# Altium PCB PCB1.PcbDoc
Units mm, origin at the board's own origin, x right, y up, seen from the top; angles counter-clockwise.
Board outline 100 x 75 mm, 2 copper layers (Top Layer, Bottom Layer), stack 1.571 mm thick; 44 components, 27 nets, 102 pads, 0 vias.
Unrouted connection lines stored in the file: 4.
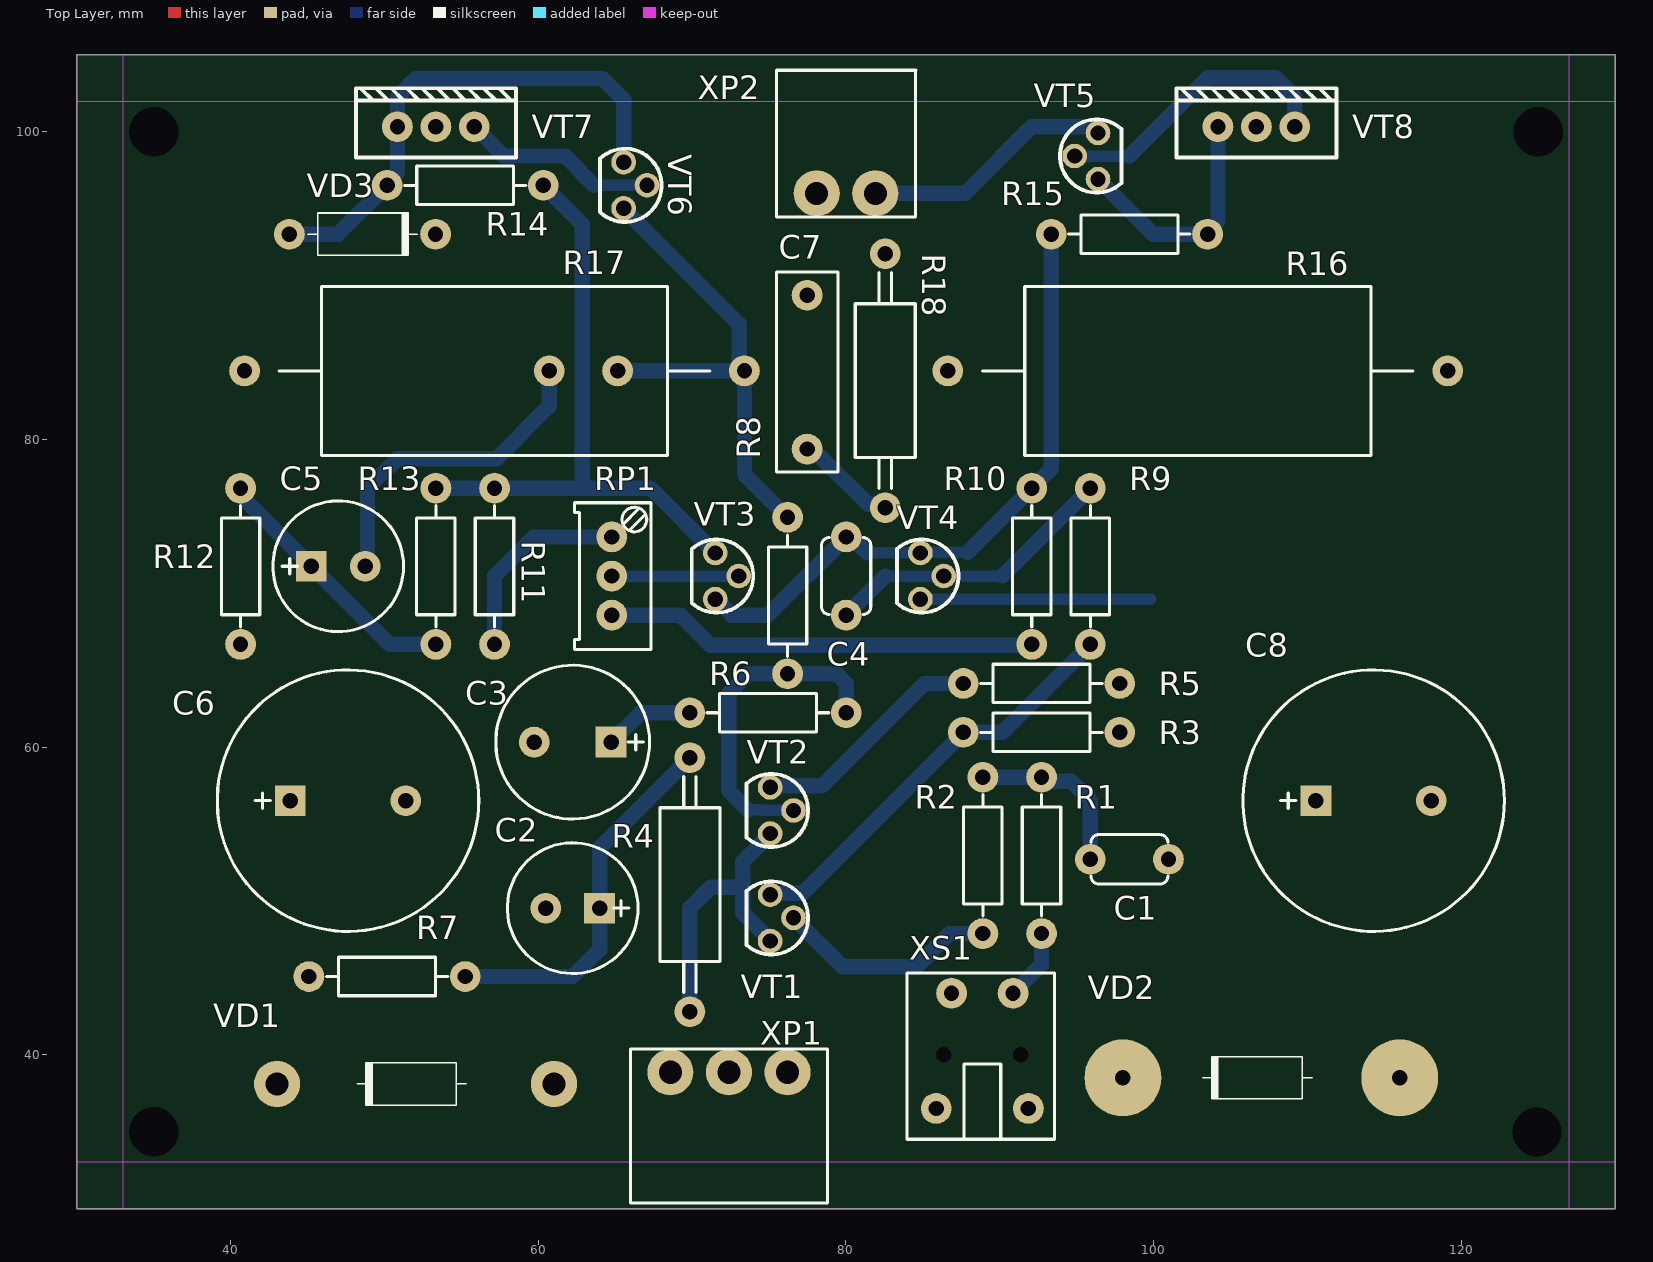
[diagram p0: Top Layer view]
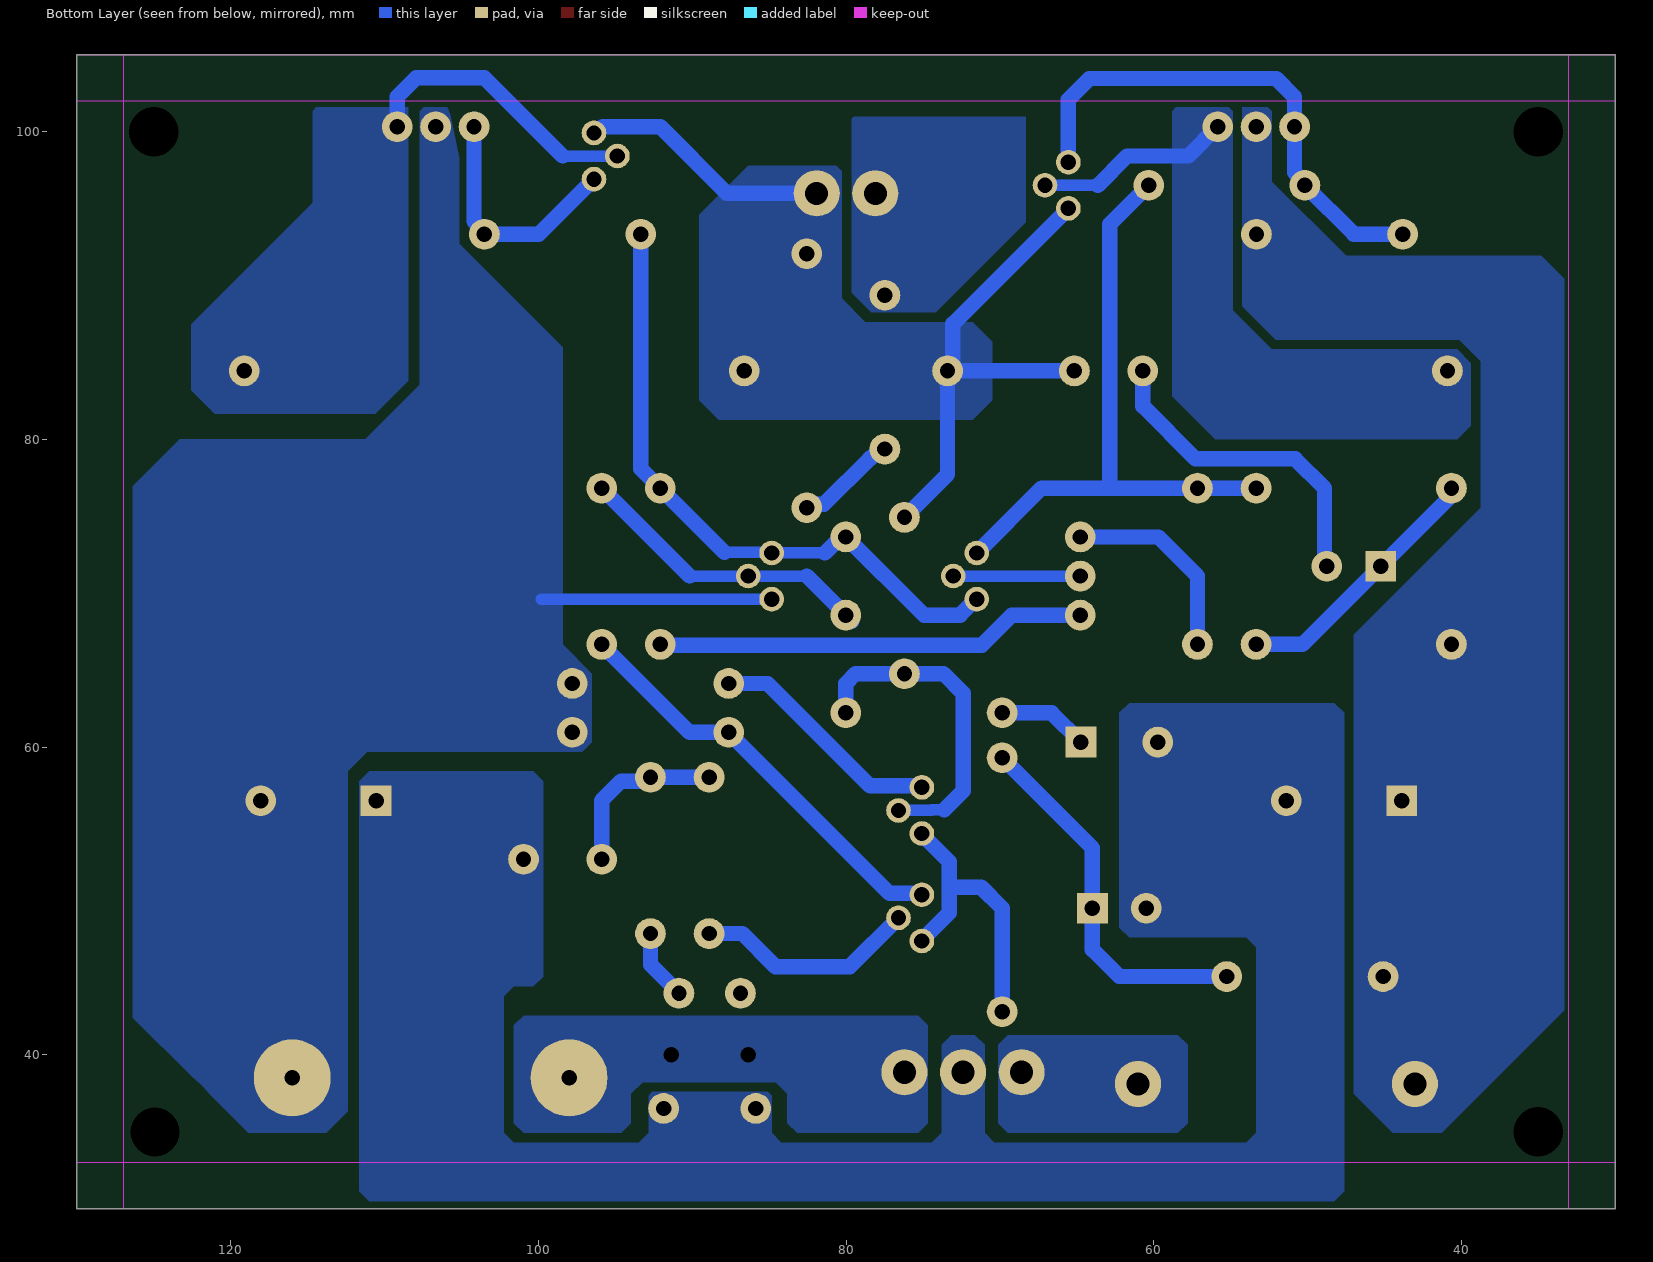
[diagram p1: Bottom Layer view, seen from below]
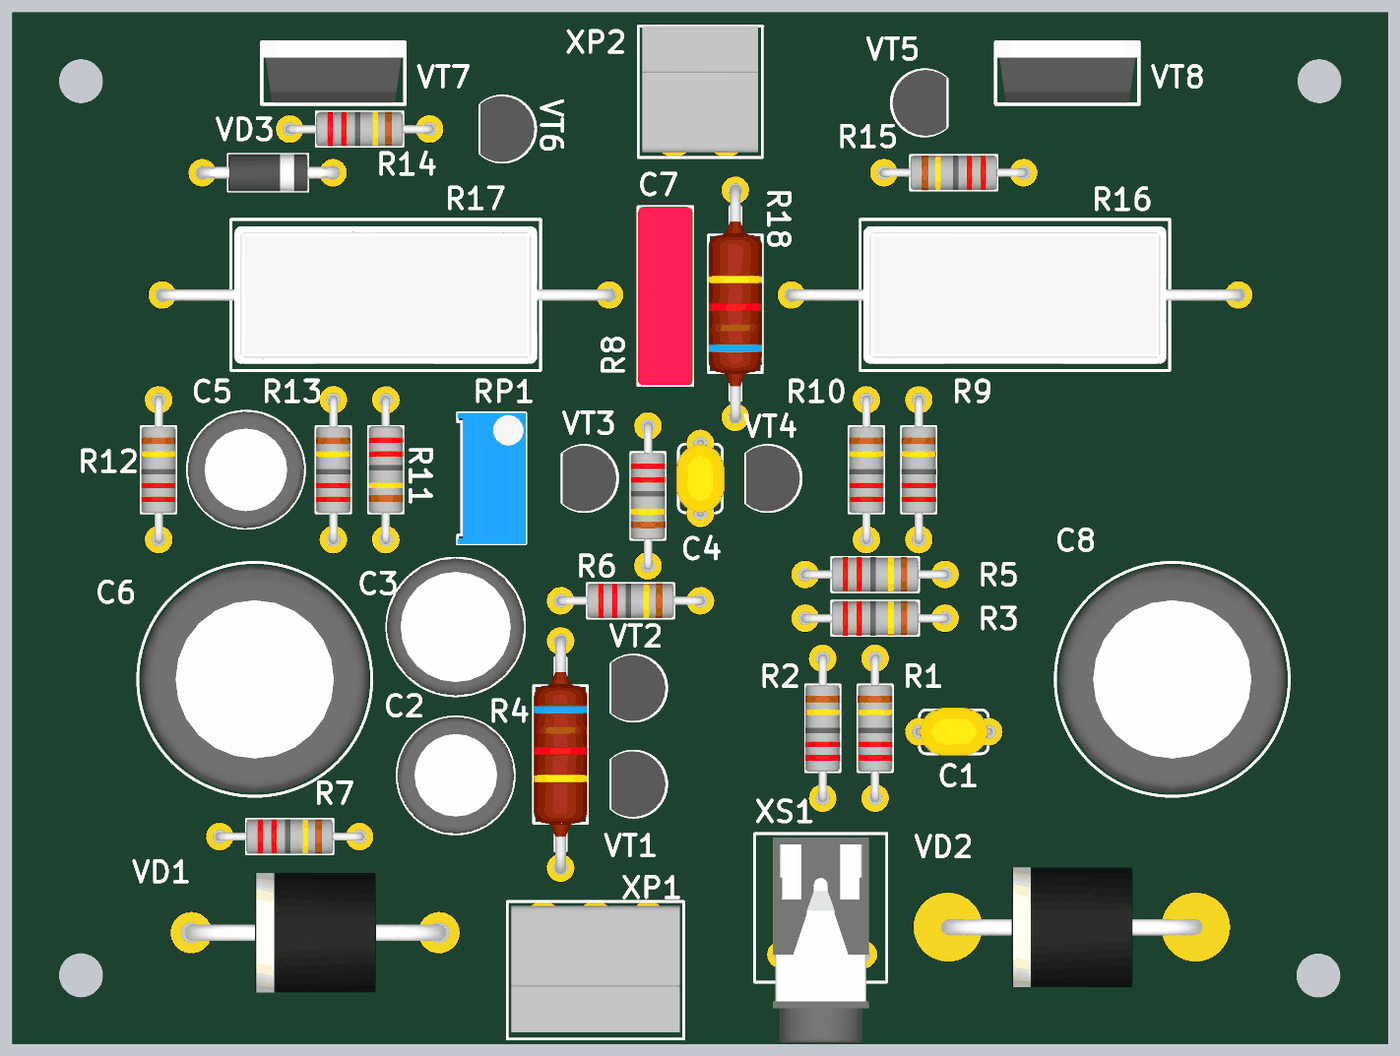
[diagram p2: 3D render of the assembled board from above, using the file's embedded part models]

## Layer stack, top to bottom
Top Solder: solder mask 0.0102, Solder Resist, Dk 3.5
Top Layer: signal copper 0.0356
Dielectric 1: dielectric 1.5, FR-4, Dk 4.8
Bottom Layer: signal copper 0.0356
Bottom Solder: solder mask 0.0102, Solder Resist, Dk 3.5

## Board outline
30,30 130,30 130,105 30,105

## Design rules (kind name [scope] priority, off if disabled: settings)
AcuteAngle [All] p1: minimum=3.50000000000000E+0001 checktracksonly=FALSE
BoardOutlineClearance "BoardOutlineClearance 1" [All] p1: gap=0.25 ignorepadtopadclearanceinfootprint=FALSE except(0: Arc-SplitContinuation Track-SplitContinuation SMDPad-SplitContinuation THPad-SplitContinuation Via-SplitContinuation Fill-SplitContinuation Poly-SplitContinuation Region-SplitContinuation Text-SplitContinuation) // Milling
Clearance "Clearance-1 1 Oz" [All] p1: gap=0.3 ignorepadtopadclearanceinfootprint=FALSE // Standart
ComponentClearance [All] p1: gap=0.1 collisioncheckmode=3 verticalgap=0.1 showdistances=FALSE
DiffPairsRouting "DiffPairsRouting 1 Oz" [All] p1: maxlimit=0.254 minlimit=0.2 mostfreqgap=0.254 toplayer_minwidth=0.2 toplayer_maxwidth=0.381 toplayer_prefwidth=0.381 bottomlayer_minwidth=0.2 bottomlayer_maxwidth=0.381 bottomlayer_prefwidth=0.381 maxuncoupledlength=12.7
Height [All] p1: minheight=0 maxheight=50 prefheight=12.7
HoleSize "Minimum HoleSize" [IsPad] p1: absolutevalues=TRUE maxlimit=5.9 minlimit=0.6 maxpercent=80.000 minpercent=20.000
HoleSize "Minimum HoleSize VIA 1" [IsVia] p2: absolutevalues=TRUE maxlimit=5.9 minlimit=0.3 maxpercent=80.000 minpercent=20.000 // Standart
HoleToHoleClearance Hole2HoleClearance [All] p1: gap=0.25 allowstackedmicrovias=FALSE
MinimumAnnularRing "Minimum AR VIA Standart" [All] p1: minimumring=0.15
MinimumAnnularRing "Minimum AR PAD Standart" [All] p2: minimumring=0.2
MinimumSolderMaskSliver "SolderMask Bridge Standart" [All] p1: minsoldermaskwidth=0.15 // All Masks
PlaneClearance "PlaneClearance 1 Oz" [All] p1: clearance=0.2
PlaneConnect "TermalConnect-1 1 Oz" [All] p1: planeconnectstyle=Relief reliefexpansion=0.2 reliefentries=4 reliefconductorwidth=0.2 reliefairgap=0.2 // Standart
PolygonConnect [All vs IsNamedPolygon('NONET_L-01_P-001')] p1: thpad.connectstyle=Direct thpad.reliefconductorwidth=0.254 thpad.reliefentries=4 thpad.polygonreliefangle="90 Angle" thpad.airgapwidth=0.254 smdpad.connectstyle=Relief smdpad.reliefconductorwidth=0.254 smdpad.reliefentries=4 smdpad.polygonreliefangle="90 Angle" smdpad.airgapwidth=0.254 via.connectstyle=Direct via.reliefconductorwidth=0.254 via.reliefentries=4 via.polygonreliefangle="90 Angle" via.airgapwidth=0.254
PolygonConnect "PolygonConnect-1 1 Oz" [All] p2: thpad.connectstyle=Relief thpad.reliefconductorwidth=0.2 thpad.reliefentries=4 thpad.polygonreliefangle="90 Angle" thpad.airgapwidth=0.2 smdpad.connectstyle=Relief smdpad.reliefconductorwidth=0.2 smdpad.reliefentries=4 smdpad.polygonreliefangle="90 Angle" smdpad.airgapwidth=0.2 via.connectstyle=Direct via.reliefconductorwidth=0.254 via.reliefentries=4 via.polygonreliefangle="90 Angle" via.airgapwidth=0.254 // Standart
RoutingCorners [All] p1 off: cornerstyle=45-Degree minsetback=2.54 maxsetback=2.54
RoutingVias [All] p1: holewidth=0.4 width=0.8 viastyle="Through Hole" minholewidth=0.3 minwidth=0.6 maxholewidth=5.9 maxwidth=8.9
SilkToSilkClearance Silk2SilkClearance [All] p1 off: silktosilkclearance=0.15
SilkToSolderMaskClearance Silk2SolderMaskClearance [IsPad] p1 off: minsilkscreentomaskgap=0.15 clearancetoexposedcopper=TRUE
SolderMaskExpansion SolderMaskExpansion-1 [All] p1: expansion=0.05 istentingtop=FALSE // Standart
UnRoutedNet [All] p1: checkbadconnections=TRUE
Width "Width 1 Oz" [All] p1: maxlimit=10 minlimit=0.2 preferedwidth=0.254 checkconnectedcopper=TRUE
18 further rules are at their usual default settings.

## Classes and differential pairs
component class Sheet1: C1 C2 C3 C4 C5 C6 C7 C8 R1 R2 R3 R4 R5 R6 R7 R8 R9 R10 R11 R12 R13 R14 R15 R16 R17 R18 RP1 VD1 VT1 VT2 VT3 VT4 VT5 VT6 VT7 VT8 XP1 XS1

## Components (designator, comment, footprint, x,y, rotation, side; value= is the part's Value field where it differs from the comment)
C1 "Cap Ceramic 100pF" CAPRR508-350X500X500 98.425,52.705 r0 top
C2 "2200uF 35V" CAPPR350-800X700 62.23,49.53 r180 top
C3 "100uF 100V" CAPPR500-1000X2050 62.23,60.325 r180 top
C4 "Cap Ceramic 100pF" CAPRR508-350X500X500 80.01,71.12 r90 top
C5 "2200uF 35V" CAPPR350-800X700 46.99,71.755 r0 top
C6 "2200uF 35V" CAPPR750-1600X3150 47.625,56.515 r0 top
C7 "2200uF 35V" CAPR1000-400X1300X950 77.47,84.375 r90 top
C8 "2200uF 35V" CAPPR750-1600X3150 114.3,56.515 r0 top
R1 "Resistor 0.25W" RES1016-630X250 92.71,52.959 r270 top
R2 "Resistor 0.25W" RES1016-630X250 88.9,52.959 r270 top
R3 "Resistor 0.25W" RES1016-630X250 92.71,60.96 r180 top
R4 "Resistor 1W" RES1651-1000X390 69.85,51.054 r270 top
R5 "Resistor 0.25W" RES1016-630X250 92.71,64.135 r180 top
R6 "Resistor 0.25W" RES1016-630X250 74.93,62.23 r180 top
R7 "Resistor 0.25W" RES1016-630X250 50.165,45.085 r180 top
R8 "Resistor 0.25W" RES1016-630X250 76.2,69.85 r90 top
R9 "Resistor 0.25W" RES1016-630X250 95.885,71.755 r270 top
R10 "Resistor 0.25W" RES1016-630X250 92.075,71.755 r270 top
R11 "Resistor 0.25W" RES1016-630X250 57.15,71.755 r90 top
R12 "Resistor 0.25W" RES1016-630X250 40.64,71.755 r270 top
R13 "Resistor 0.25W" RES1016-630X250 53.34,71.755 r270 top
R14 "Resistor 0.25W" RES1016-630X250 55.245,96.52 r180 top
R15 "Resistor 0.25W" RES1016-630X250 98.425,93.345 r0 top
R16 "Resistor 5W" RES_5W 102.87,84.455 r180 top
R17 "Resistor 5W" RES_5W 57.15,84.455 r180 top
R18 "Resistor 1W" RES1651-1000X390 82.55,83.82 r90 top
RP1 "Resistor film, =Value, , 3296W, 0.5W, -55...+125°C" TRIM_BOURNS_3296W 64.77,71.12 r270 top
VD1 "Diode 15SQ045" R6#1 56.515,38.1 r180 top
VD2 "Diode 15SQ045" R6#2 111.5,38.5 r180 top
VD3 "Diode 1N4002" DO-41 43.815,93.345 r0 top
VT1 "BC556B" TO-92-A 75.565,48.895 r90 top
VT2 "BC556B" TO-92-A 75.565,55.88 r90 top
VT3 "Transistor NPN BC546C" TO-92-A 72,71.12 r90 top
VT4 "Transistor NPN BC546C" TO-92-A 85.335,71.12 r90 top
VT5 "BC556B" TO-92-A 95.885,98.425 r270 top
VT6 "BC546C" TO-92-A 66.04,96.52 r90 top
VT7 "" TO-220AB 53.34,100.33 r0 top
VT8 "IRF9510PBF" TO-220AB 106.68,100.33 r0 top
XP1 "Общий" 15EDGRC-3.81-03P 72.39,38.862 r0 top
XP2 "Connector Dynamic 2 pin" 15EDGRC-3.81-02P 80,96 r180 top
XS1 "Общий" ST-025 85.46,35.905 r0 top
ZBOAS196893188 "Comment" "BOASVIEWside:Вид платы сверху:1:0:0:0" 50,2367 r0 top
ZBOAS196894921 "Слой 2" "BOASVIEWlayer:Bottom Layer:1:1:32:1" 50,2411 r0 top (schematic designator fewf)
ZBOAS753997874 "Comment" "BOASVIEWdrill:Таблица отверстий:0:0:0:0" 191.5,2486 r0 top

## Footprints (in the part's own frame and the unit in brackets; to place one, negate y for a bottom-side part, rotate by r counter-clockwise, add the part's x,y. Pads: shape width x height; smd on the part's side, far side on the other; paste and mask are expansions set on the pad)
15EDGRC-3.81-02P [mm] "PCB Header, 8A, 160 V, Pitch: 3.81mm, 2 Positions, MCV Serie"
  round 3 hole 1.5 unplated: 1(-1.905,0) 2(1.905,0)
  silkscreen extent -4.56,-8 4.51,1.55, body extent -4.21,-8 4.21,1.2, height 7.29
15EDGRC-3.81-03P [mm] "PCB Header, 8A, 160 V, Pitch: 3.81mm, 3 Positions, MCV Serie"
  round 3 hole 1.5 unplated: 1(-3.81,0) 2(0,0) 3(3.81,0)
  silkscreen extent -6.41,-8.5 6.41,1.5, body extent -6.11,-8 6.11,1.2, height 7.29
"BOASVIEWdrill:Таблица отверстий:0:0:0:0" [mm]
"BOASVIEWlayer:Bottom Layer:1:1:32:1" [mm]
"BOASVIEWside:Вид платы сверху:1:0:0:0" [mm]
CAPPR350-800X700 [mm] "Capacitor, Radial, Pin spacing 3.5mm - Body Diameter 8mm X Body Height 7mm"
  rect 2x2 hole 1 unplated: 1(-1.75,0)
  round 2 hole 1 unplated: 2(1.75,0)
  silkscreen extent -4.25,-4.25 4.25,4.25, body extent -4.26,-4.26 4.24,4.23, height 7
CAPPR500-1000X2050 [mm] "Capacitor, Radial, Pin spacing 5.0mm - Body Diameter 10mm X Body Height 20.5mm"
  rect 2x2 hole 1 unplated: 1(-2.5,0)
  round 2 hole 1 unplated: 2(2.5,0)
  silkscreen extent -5,-5 5,5, body extent -5,-5 5,5, height 20.5
CAPPR750-1600X3150 [mm] "Capacitor, Radial, Pin spacing 7.5mm - Body Diameter 16mm X Body  Height 31.5mm"
  rect 2x2 hole 1 unplated: 1(-3.75,0)
  round 2 hole 1 unplated: 2(3.75,0)
  silkscreen extent -8.5,-8.5 8.5,8.5, body extent -8.25,-8.24 8.25,8.24, height 27
CAPR1000-400X1300X950 [mm] "Capacitor Radial, Pin spacing 10mm - Body With 4mm X Body Length 13mm X Body Height 9.5mm"
  round 2 hole 1 unplated: 1(-5,0) 2(5,0)
  silkscreen extent -6.5,-2 6.5,2, body extent -6.5,-2 6.5,2, height 9.5
CAPRR508-350X500X500 [mm] "Capacitor Radial Rounded, Pin spacing 5.08mm - Body With 3.2mm X Body Length 5.0mm X Body Height 5.0mm"
  round 2 hole 1 unplated: 1(-2.54,0) 2(2.54,0)
  silkscreen extent -2.5,-1.6 2.5,1.6, body extent -2.79,-1.75 2.79,1.75, height 5
DO-41 [mm]
  round 2 hole 1 unplated: 1(0,0) 2(9.5,0)
  silkscreen extent 1.2,-1.38 8.3,1.38, body extent -0.39,-1.35 9.99,1.35, height 2.83
R6#1 [mm]
  round 3 hole 1.5 unplated: 1(-4.5,0) 2(13.5,0)
  silkscreen extent 1.2,-1.38 8.3,1.38, body extent -5,-4.35 13.96,4.35, height 9.35
R6#2 [mm]
  round 5 hole 1: 1(-4.5,0) 2(13.5,0)
  silkscreen extent 1.2,-1.38 8.3,1.38, body extent -5,-4.35 13.96,4.35, height 9.35
RES1016-630X250 [mm] "Resistor, Axial, Pad spacing 10.16 mm - Body Lengh 6.3mm X Body Diameter 2.5mm"
  round 2 hole 1 unplated: 1(-5.08,0) 2(5.08,0)
  silkscreen extent -3.95,-1.25 3.95,1.25, body extent -5.38,-1.27 5.38,1.26, height 2.51
RES1651-1000X390 [mm] "Resistor, Axial, Pad spacing 16.51mm - Body Lengh 10mm X Body Diameter 3.9mm"
  round 2 hole 1 unplated: 1(-8.255,0) 2(8.255,0)
  silkscreen extent -7.02,-1.95 7.02,1.95, body extent -8.64,-1.95 8.65,1.95, height 3.9
RES_5W [mm] "Resistor, Axial, Pad spacing 10.16 mm - Body Lengh 6.3mm X Body Diameter 2.5mm"
  round 2 hole 1 unplated: 1(-16.25,0) 2(16.25,0)
  silkscreen extent -14,-5.5 14,5.5, body extent -16.65,-5 16.65,5, height 9
ST-025 [mm]
  round 2 hole 1 unplated: 1(0.4,0.6) 1(6.4,0.6) 2(1.4,8.1) 3(5.4,8.1)
  round 0.9 hole 1 unplated: 2(0.9,4.1) 2(5.9,4.1)
  silkscreen extent -1.5,-1.4 8.1,9.4, body extent -0.44,-5.8 7.04,9.1, height 6
TO-92-A [mm]
  round 1.6 hole 1 unplated: 1(1.5,0.5) 2(0,-1.025) 3(-1.5,0.5)
  silkscreen extent -2.38,-1.97 2.38,2.02, body extent -2.4,-1.92 2.4,2.01, height 10
TO-220AB [mm] "КТ-28-2"
  round 2 hole 1 unplated: 1(-2.5,0) 2(0,0) 3(2.5,0)
  silkscreen extent -5.2,-2 5.2,2.5, body extent -5.1,-1.9 5.1,2.6, height 26.06
TRIM_BOURNS_3296W [mm] "Trimming Potentiometer BOURNS 3296W Series"
  round 2 hole 1 unplated: 1(-2.54,0) 2(0,0) 3(2.54,0)
  silkscreen extent -4.76,-2.41 4.76,2.54, body extent -4.76,-2.41 4.77,2.55, height 11.55

## Part data
C2 C5: library part "Cap Polarity 47uF 50V", Type=Конденсатор
C3: library part "Cap Polarity 100uF 100V", Type=Конденсатор
C6 C8: library part "Cap Polarity 2200uF 35V", Type=Конденсатор
C7: library part "Cap Film 0.68uF 250V", Type=Конденсатор
RP1: library part "Resistor Trimmer 1K", Manufacturer=Bourns, Package=3296W, PartNumber=3296W-1-103LF, Power=0.5W, Temperature=-55...+125°C, TypeResistor="Resistor film", ValueManufacturerPartNumber="Resistor film, =Value, , 3296W, 0.5W, -55...+125°C", HelpURL=https://www.digikey.com/product-detail/en/bourns-inc/3296W-1-103LF/3296W-103LF-ND/1088045
VT7: library part IRF510PBF
XP1: library part "Connector Power 3 pin"
XS1: library part "Connector Audio 3 pin"
C1 C4: Type=Конденсатор
R1 R2 R3 R4 R5 R6 R7 R8 R9 R10 R11 R12 R13 R14 R15 R16 R17 R18: Type=Резистор
VD1 VD2 VD3: Published=18.05.2010, Publisher="Andrew Danich", Type=Диод

## Free pads (board coordinates)
  round 2 hole 1 unplated: 3(60.706,84.455) 3(65.151,84.455)
  round 3 hole 3.2 unplated: A(35,35) A(35,100) A(124.922,34.979) A(125,100)

## Nets (pads, with @x,y where several pads share a name; then routed paths per layer and width w, separated by ;. In a path a pad name is that pad's centre, name@x,y a point inside that pad or via, vN(x,y) a via of type N, cw(c..) or ccw(c..) an arc to the next point about the centre after c; other vN are vias at no path point)
GND: C1.2 C2.2 C3.2 C6.2 C7.2 C8.1 XP1.2 XP2.2 XS1.1
NetC1_1: C1.1 R1.1 R2.1 | length 11.3
  Bottom Layer w1: R2.1 R1.1 ; R1.1@92.71,57.785 94.615,57.785 95.885,56.515 C1.1
NetC2_1: C2.1 R4.1 R7.1 VD1.2 | length 24.4
  Bottom Layer w1: R7.1 62.23,45.085 63.98,46.835 C2.1 63.98,53.439 R4.1
NetC3_1: C3.1 R6.2 | length 5.9
  Bottom Layer w1: C3.1 66.635,62.23 R6.2
NetC4_1: C4.1 R9.1 VT4.2 | length 20.1
  Bottom Layer w0.75: 82.55,71.12 85.48,71.12 VT4.2 90.17,71.12
  Bottom Layer w1: C4.1@79.622,68.192 82.55,71.12 ; 90.17,71.12 R9.1@96.081,77.031
NetC4_2: C4.2 R10.1 R15.1 VT3.3 VT4.1 | length 42.4
  Bottom Layer w0.75: 81.375,72.62 VT4.1@84.781,72.62 ; VT4.1@84.835,72.658 87.898,72.658
  Bottom Layer w1: VT3.3 71.535,69.62 72.575,68.58 74.93,68.58 C4.2@80.121,73.771 ; C4.2 80.335,73.66 81.375,72.62 ; 87.898,72.658 93.345,78.105 R15.1
NetC5_1: C5.1 R12.1 R13.2 | length 17.2
  Bottom Layer w1: R12.1 40.755,76.72 40.755,76.24 C5.1 50.32,66.675 R13.2
NetC5_2: C5.2 pad.3 R8.2 R16.2 R17.1 R18.2 VT5.3 VT6.3 XP2.1 | length 70.6
  Bottom Layer w1: C5.2 48.895,71.91 48.895,76.835 50.8,78.74 57.277,78.74 60.706,82.169 pad.3@60.706,84.455 ; pad.3@65.151,84.455 R17.1 ; VT6.3 73.051,87.509 73.051,84.804 R17.1 ; R8.2 73.4,77.73 R17.1 ; XP2.1 87.745,96 92.075,100.33 95.818,100.33 96.223,99.925 VT5.3
NetC6_1: C6.1 R7.2 R12.2 VD3.2 VT7.2
NetC7_1: C7.1 R18.1 | length 6.7
  Bottom Layer w1: C7.1 77.795,79.375 78.395,78.775 78.451,78.775 81.431,75.795 82.32,75.795 R18.1
NetC8_2: C8.2 R3.1 R5.1 VD2.1 VT4.3 VT8.2 | length 15
  Bottom Layer w0.75: VT4.3 99.798,69.62
NetR1_2: R1.2 XS1.3 | length 4.4
  Bottom Layer w1: XS1.3 92.71,45.855 R1.2@92.71,47.625
NetR2_2: R2.2 VT1.2 | length 14.5
  Bottom Layer w1: VT1.2 79.765,45.72 84.582,45.72 86.741,47.879 R2.2
NetR3_2: R3.2 R9.2 VT1.1 | length 27.9
  Bottom Layer w1: VT1.1 75.165,50.495 77.165,50.495 R3.2 ; R3.2@87.305,60.96 90.17,60.96 R9.2
NetR4_2: R4.2 VT1.3 VT2.3 | length 19.2
  Bottom Layer w1: R4.2 69.85,49.53 71.208,50.888 73.279,50.888 ; VT1.3 75.065,47.449 73.279,49.235 73.279,50.888 ; VT2.3 75.065,54.326 73.279,52.54 73.279,50.888
NetR5_2: R5.2 VT2.1 | length 15.4
  Bottom Layer w1: VT2.1 75.165,57.48 78.435,57.48 85.09,64.135 R5.2
NetR6_1: R6.1 R8.1 VT2.2 | length 21.4
  Bottom Layer w0.75: 73.622,55.918 74.441,55.918 74.454,55.905 76.538,55.905 VT2.2@76.552,55.918
  Bottom Layer w1: 73.622,55.918 72.39,57.15 72.39,63.5 73.66,64.77 R8.1 79.375,64.77 80.01,64.135 R6.1 ; VT2.2@76.552,55.918 VT2.2
NetR10_2: R10.2 RP1.3 | length 28.1
  Bottom Layer w1: RP1.3 69.215,68.58 71.178,66.617 92.017,66.617 R10.2
NetR11_1: R11.1 RP1.1 | length 13.1
  Bottom Layer w1: R11.1 57.15,71.12 59.69,73.66 RP1.1@64.796,73.66
NetR11_2: R11.2 R13.1 R14.1 VT3.1 | length 40.6
  Bottom Layer w1: R13.1 R11.2 62.865,76.835 ; R14.1 62.865,93.98 62.865,76.835 ; VT3.1 67.285,76.835 62.865,76.835
NetR14_2: R14.2 VD3.1 VT6.1 VT7.1 | length 33.5
  Bottom Layer w1: VD3.1 46.99,93.345 R14.2 50.165,96.682 50.84,97.357 50.84,102.275 52.03,103.465 64.175,103.465 65.54,102.1 VT6.1
NetR15_2: R15.2 VT5.1 VT8.1 | length 15.9
  Bottom Layer w1: VT5.1 99.965,93.345 R15.2 103.505,93.507 104.18,94.182 VT8.1
NetR16_1: R16.1 VT5.2 VT8.3 | length 18.9
  Bottom Layer w0.75: VT5.2 98.425,98.425
  Bottom Layer w1: 98.425,98.425 103.505,103.505 107.95,103.505 109.18,102.275 VT8.3
NetR17_2: R17.2 VT6.2 VT7.3 | length 12.8
  Bottom Layer w0.75: 63.627,96.52 VT6.2
  Bottom Layer w1: VT7.3 57.745,98.425 61.722,98.425 63.627,96.52
NetRP1_2: RP1.2 VT3.2 | length 8.3
  Bottom Layer w0.75: RP1.2 VT3.2
NetVD1_1: VD1.1 XP1.1
NetVD2_2: VD2.2 XP1.3
pads on no net: XS1.2

## Polygon pours and split planes (outlines as drawn)
NetC8_2 on Bottom Layer "NONET_L-01_P-001" (solid, remove dead copper, pour order 9): 113.792,34.925 118.872,34.925 126.365,42.418 126.365,76.962 123.317,80.01 111.252,80.01 107.696,83.566 107.696,101.346 107.442,101.6 105.918,101.6 105.718,101.118 105.156,98.291 105.156,92.71 98.425,85.979 98.425,66.675 96.52,64.77 96.52,60.325 97.155,59.69 111.125,59.69 112.395,58.42 112.395,36.322
no net on Bottom Layer "NONET_L-01_P-001" (solid, remove dead copper, pour order 6): 75.311,34.925 83.185,34.925 83.82,35.56 83.82,37.465 84.582,38.227 93.218,38.227 93.98,37.465 93.98,35.56 94.615,34.925 100.965,34.925 101.6,35.56 101.6,41.91 100.965,42.545 75.311,42.545 74.676,41.91 74.676,35.56
GND on Bottom Layer "NONET_L-01_P-001" (solid, remove dead copper, pour order 10): 79.629,89.535 78.359,88.265 74.168,88.265 68.326,94.107 68.326,100.965 79.502,100.965 79.629,100.838
GND on Bottom Layer "NONET_L-01_P-001" (solid, remove dead copper, pour order 8): 73.787,40.64 73.787,34.925 74.422,34.29 84.201,34.29 84.836,34.925 84.836,37.338 85.09,37.592 92.583,37.592 92.837,37.338 92.837,34.925 93.472,34.29 101.6,34.29 102.235,34.925 102.235,43.815 101.6,44.45 100.33,44.45 99.695,45.085 99.695,57.785 100.33,58.42 110.998,58.42 111.633,57.785 111.633,31.115 110.998,30.48 48.26,30.48 47.625,31.115 47.625,62.23 48.26,62.865 61.595,62.865 62.23,62.23 62.23,48.26 61.595,47.625 53.975,47.625 53.34,46.99 53.34,34.925 53.975,34.29 70.358,34.29 70.993,34.925 70.993,40.64 71.628,41.275 73.152,41.275
NetR16_1 on Bottom Layer "NONET_L-01_P-001" (solid, remove dead copper, pour order 3): 108.458,101.6 108.458,83.82 110.617,81.661 121.031,81.661 122.555,83.185 122.555,87.503 114.681,95.377 114.681,101.346 114.427,101.6
NetC5_2 on Bottom Layer "NONET_L-01_P-001" (solid, remove dead copper, pour order 0): 80.289,97.434 80.289,89.179 78.74,87.63 71.755,87.63 70.485,86.36 70.485,82.55 71.755,81.28 88.265,81.28 89.535,82.55 89.535,94.615 86.36,97.79 80.645,97.79
NetVD1_1 on Bottom Layer "NONET_L-01_P-001" (solid, remove dead copper, pour order 5): 57.785,40.64 57.785,35.56 58.42,34.925 69.469,34.925 70.104,35.56 70.104,40.64 69.469,41.275 58.42,41.275
NetR17_2 on Bottom Layer "NONET_L-01_P-001" (solid, remove dead copper, pour order 2): 54.864,101.346 54.864,88.392 52.324,85.852 40.259,85.852 39.37,84.963 39.37,80.899 40.259,80.01 56.007,80.01 58.801,82.804 58.801,101.346 58.547,101.6 55.118,101.6
NetC6_1 on Bottom Layer "NONET_L-01_P-001" (solid, remove dead copper, pour order 1): 54.229,101.6 54.229,88.646 52.07,86.487 40.132,86.487 38.735,85.09 38.735,75.565 46.99,67.31 46.99,37.465 44.45,34.925 41.275,34.925 33.02,43.18 33.02,90.17 34.798,91.948 47.491,91.948 52.324,96.765 52.324,101.346 52.578,101.6

## Keep-outs
Keep-Out Layer:
  rectangle: 30,30 130,33
  rectangle: 30,102 130,105
  rectangle: 127,30 130,105
  rectangle: 30,30 33,105

## Silkscreen, mask and mechanical layers (free items; w line width, h text height)
Mechanical 1:
  the board outline again, w0.1
Mechanical 7:
  text "BOASFORMAT|А3|1|0|883070867|165354330|1000000000|1:1|" at 0,2540 h0
  text "- Данные отверстий" at 223.979,2488.436 h7.68
  text "+0.1" at 256.845,2468 h3.5
  text "+0.1" at 207.84,2467.845 h3.5
  text "DimH|-4330709|-196851|34251969|971259843|-5905512|9645669|1||±0.5||js12|False|False|False|False" at 87,2467 h0
  text "DimH|-39370078|0|58661417|970866142|-19685039|3937008|1||±0.5||js12|False|False|False|False" at 149,2466 h0
  text "DimV|0|-29527559|58661417|970866142|3937008|-14763780|1||±0.5||js12|False|False|False|False" at 149,2466 h0
  text "DimH|-39370078|0|58661417|970866142|-19685039|3937008|1||±0.5||js12|False|False|False|False" at 149,2466 h0
  text "DimH|-39370078|0|58661417|970866142|-19685039|3937008|1||±0.5||js12|False|False|False|False" at 149,2466 h0
  text "DimV|0|-29527559|58661417|970866142|3937008|-14763780|1||±0.5||js12|False|False|False|False" at 149,2466 h0
  text "DimH|-39370078|0|58661417|970866142|0|3937008|1||±0.5||js12|False|False|False|False" at 149,2466 h0
  text "DimV|0|-29527559|58661417|970866142|3937008|0|1||±0.5||js12|False|False|False|False" at 149,2466 h0
  text "DimV|0|-29527559|58661417|970866142|3937008|0|1||||js12|False|False|False|False" at 149,2466 h0
  text "DimH|-39370078|0|58661417|970866142|-787401|3937008|1||||js12|False|False|False|False" at 149,2466 h0
  text "-0.1" at 256.845,2464 h3.5
  text "-0.1" at 207.84,2463.845 h3.5
  text "+0.1" at 209.84,2458.845 h3.5
  text "+0.1" at 256.84,2458.845 h3.5
  text "-0.1" at 209.84,2454.845 h3.5
  text "-0.1" at 256.84,2454.845 h3.5
  text "+0.1" at 210.84,2449.845 h3.5
  text "-0.1" at 210.84,2445.845 h3.5
  text "DimRoughness|0|0|-40157480|-928346457|1|||||0|0|False|2" at 102,2358 h0
  text "DimV|0|-590551|58661417|928149606|3937008|-393700|1||±0.5||js12|False|False|False|False" at 149,2357.5 h0
  text "DimV|0|-590551|59448819|928149606|1574803|-4724409|1||±0.5||js12|False|False|False|False" at 151,2357.5 h0
  text "DimV|0|-590551|59448819|928149606|1574803|-4133858|1||±0.5||js12|False|True|False|False" at 154.03,2356.185 h0
  text "DimRoughness|0|0|-40157480|-921653543|1|||||0|0|False|2" at 102,2341 h0
  text "* Размеры для справок / 1. Шаг координатной сетки 2мм / 2. Плату изготовить химическим негативным методом / 3. Класс точности платы по ГОСТ Р 53429-2009-1: 2 / 4. Параметры отверстий платы приведены в таблице 1 / 5. Плата должна соответствовать ГОСТ 23752-79, группа жесткости - 1 / 6. Финишное покрытие металлизированных поверхностей меди по ГОСТ 9.301-86, контактных зон - припоем ПОС-61 ГОСТ 21930-76 толщиной не менее 50 мкм. / 7. Остальные технические требования по ОСТ 4 ГО.070.015-75" at 229.5,2323 h7.5
  text "Усилитель  / низкой частоты" at 282.345,2272.5 h7
  text "Плата печатная" at 282.345,2265.5 h5
  text "FR4 ГОСТ 26246.5-89" at 281.345,2253 h5
  text "МГТУ им. Н.Э. Баумана / Кафедра ИУ4 / Группа ИУ4-52Б" at 341.845,2250.5 h3.5
  text "SET2|Superlayer=MechanicalLayer7|Wsuperlayer=MechanicalLayer8|Layergrid=MechanicalLayer9|Werase=MechanicalLayer11|Layermark=MechanicalLayer12|Layerstamp=MechanicalLayer13|Thinline=0,18|Basicline=0,6|Gridline=0,18|Boardline=0,6|Contourpolygonline=0,6|PcbGridStep=2|PcbGridCleareanceAtView=0|PcbGridNumberEach=l10|PcbGridLineEach=l4|PcbGridCountSecondaryStrip=4|PcbGridEnabledStrip=True|PcbGridHorizontal90=False|PcbGridWhiteAreaBeforeText=True|PcbSignalGridEnabled=True|PcbSignalShowBukva=True|RealSignalLayerNames=False|PcbGridEnabledBothSide=False|PcbPolarGridEnabled=False|PcbPolarGridAngleStep=10|PcbPolarGridRadialStep=10|PcbPolarGridCenterPcbGrid=False|SilkShowPad=True|SilkViewName=Слой маркировки|SilkShowHole=True|SilkShowAxis=True|SilkShowBukva=True|SilkShowGrid=False|SolderShowGrid=False|SolderViewName=Слой маски|SolderShowAxis=False|SolderShowBukva=False|MainViewShowGrid=True|MainViewUseShapesDrill=False|ShowBukvaOnSboky=True|ShowBukvaViews=True|Density=2,2|CustomHoleSizeFactor=1|TableName=Таблица 1|RazrezWidth=100|RealLayerNames=False|RazrezShowBukva=False|RazrezBukva=В-В|Sher=Ra 12,5|Asstoplayer=MechanicalLayer1|Asstoplayer2=None|Assbottomlayer=MechanicalLayer2|Assbottomlayer2=None|AssMinDiameterHoles=2|AssDim=False|AssMech=False|AssSilk=False|AssComponentSilk=False|AssFreeSilk=False|AssSmdPads=False|AssGridEnable=False|Mirror=Horisontal|PcbGridFontSize=5|PcbGridCenterZero=False|TTStampDistance=12|MainFontSize=5|PolyShtrihEnable=False|RegionShtrihEnable=False|PolyStep=2|PcbDrillDrawingGridEnabled=False|PcbDrillDrawingViewName=Слой сверловки|PcbDrillDrawingShowBukva=False|PcbDrillDrawingShowAxis=False|PcbSignalLayersUseDrill=True|PcbSignalLayersUseShapesDrill=False|PcbSignalLayersShowAxis=True" at 0,0.025 h0
  text "STAMP|Разработал|Бакулевский" at 0,0 h0
  text "STAMP|Проверил|Семенцов С.Г." at 0,0 h0
  text "STAMP|Техконтроль|" at 0,0 h0
  text "STAMP|Начальник отдела|" at 0,0 h0
  text "STAMP|Нормоконтроль|" at 0,0 h0
  text "STAMP|Утвердил|" at 0,0 h0
  text "STAMP|Var|" at 0,0 h0
  text "STAMP|Tech|Т.контр." at 0,0 h0
  text "STAMP|Normo|Н.контр." at 0,0 h0
  text "STAMP|Check|Пров." at 0,0 h0
  text "STAMP|Design|Разраб." at 0,0 h0
  text "STAMP|Utv|Утв." at 0,0 h0
  text "STAMP|Обозначение|ИУ4.11.03.03.23.05.52.04.002" at 0,0 h0
  text "STAMP|Первичная применяемость|ИУ4.11.03.03.23.05.04.001 СП" at 0,0 h0
  text "STAMP|Компания1|" at 0,0 h0
  text "STAMP|Наименование1|" at 0,0 h0
  text "STAMP|ТипДокумента|" at 0,0 h0
  text "STAMP|Материал1|" at 0,0 h0
  text "STAMP|Материал2|" at 0,0 h0
  text "STAMP|Масса|" at 0,0 h0
  text "STAMP|Lit|" at 0,0 h0
  text "STAMP|Наименование2|" at 0,0 h0
  text "STAMP|Компания2|" at 0,0 h0
  text "2STAMP|Разработал|Бакулевский М.В." at 0,0 h0
  text "2STAMP|Проверил|Семенцов С.Г." at 0,0 h0
  text "2STAMP|Техконтроль|" at 0,0 h0
  text "2STAMP|Начальник отдела|" at 0,0 h0
  text "2STAMP|Нормоконтроль|" at 0,0 h0
  text "2STAMP|Утвердил|" at 0,0 h0
  text "2STAMP|Var|" at 0,0 h0
  text "2STAMP|Tech|Т.контр." at 0,0 h0
  text "2STAMP|Normo|Н.контр." at 0,0 h0
  text "2STAMP|Check|Пров." at 0,0 h0
  text "2STAMP|Design|Разраб." at 0,0 h0
  text "2STAMP|Utv|Утв." at 0,0 h0
  text "2STAMP|Обозначение|" at 0,0 h0
  text "2STAMP|Первичная применяемость|" at 0,0 h0
  text "2STAMP|Компания1|" at 0,0 h0
  text "2STAMP|Наименование1|" at 0,0 h0
  text "2STAMP|ТипДокумента|Сборочный чертеж" at 0,0 h0
  text "2STAMP|Материал1|" at 0,0 h0
  text "2STAMP|Материал2|" at 0,0 h0
  text "2STAMP|Масса|" at 0,0 h0
  text "2STAMP|Lit|" at 0,0 h0
  text "2STAMP|Наименование2|" at 0,0 h0
  text "2STAMP|Компания2|" at 0,0 h0
  text "BOASVIADRILLTABLE:" at 0,0 h0
  text "2BOASDRILLTABLE:circle1001,393701,Нет,89,True,|circle0101,590551,Нет,9,True,|none,1259843,Нет,4,True," at 0,0 h0
Mechanical 8:
  region: 149.908,2496.092 148.215,2496.739 144.501,2497.23 144.5,2496.096 145.432,2496.095 145,2496.658 149.907,2496.003
  region: 149.908,2495.908 148.215,2495.261 144.501,2494.77 144.5,2495.904 145.432,2495.905 145,2495.342 149.907,2495.997
  region: 50.092,2495.908 51.785,2495.261 55.499,2494.77 55.5,2495.904 54.568,2495.905 55,2495.342 50.093,2495.997
  region: 50.092,2496.092 51.785,2496.739 55.499,2497.23 55.5,2496.096 54.568,2496.095 55,2496.658 50.093,2496.003
  region: 159.908,2366.908 159.261,2365.215 158.77,2361.501 159.904,2361.5 159.905,2362.432 159.342,2362 159.997,2366.907
  region: 160.092,2366.908 160.739,2365.215 161.23,2361.501 160.096,2361.5 160.095,2362.432 160.658,2362 160.003,2366.907
  region: 160.092,2368.592 160.739,2370.285 161.23,2373.999 160.096,2374 160.095,2373.068 160.658,2373.5 160.003,2368.593
  region: 159.908,2368.592 159.261,2370.285 158.77,2373.999 159.904,2374 159.905,2373.068 159.342,2373.5 159.997,2368.593
  region: 159.908,2485.908 159.261,2484.215 158.77,2480.501 159.904,2480.5 159.905,2481.432 159.342,2481 159.997,2485.907
  region: 160.092,2485.908 160.739,2484.215 161.23,2480.501 160.096,2480.5 160.095,2481.432 160.658,2481 160.003,2485.907
  region: 160.092,2411.092 160.739,2412.785 161.23,2416.499 160.096,2416.5 160.095,2415.568 160.658,2416 160.003,2411.093
  region: 159.908,2411.092 159.261,2412.785 158.77,2416.499 159.904,2416.5 159.905,2415.568 159.342,2416 159.997,2411.093
  region: 76.092,2491.592 77.785,2492.239 81.499,2492.73 81.5,2491.596 80.568,2491.595 81,2492.158 76.093,2491.503
Mechanical 9:
  circle w0.18: c100.978,2363.431 r1.67
  circle w0.18: c101,2372.33 r1.67
  region: 150,2496 145,2495.342 145.5,2496 145,2496.658
  region: 50,2496 55,2496.658 54.5,2496 55,2495.342
  region: 160,2367 160.658,2362 160,2362.5 159.342,2362
  region: 160,2368.5 159.342,2373.5 160,2373 160.658,2373.5
  region: 160,2486 160.658,2481 160,2481.5 159.342,2481
  region: 160,2411 159.342,2416 160,2415.5 160.658,2416
  lines w0.18: 50,2486 50,2497 ; 50,2496 150,2496 ; 96.068,2358.261 100.978,2366.761 103.868,2361.761 ; 98.11,2374 101,2369 105.91,2377.5 ; 150,2367 161,2367 ; 150,2368.5 161,2368.5 ; 150,2411 161,2411 ; 150,2497 150,2486 161,2486 ; 160,2337.373 160,2376.5 ; 160,2411 160,2486
  text "100" at 89.344,2498.53 h7.68
  text "75" at 157.47,2438.8 h7.68 r90
  text "1,5*" at 157.47,2341.493 h7.68 r90
Mechanical 13:
  lines w0.18: 230,2253 295,2253 ; 230,2258 295,2258 ; 230,2263 295,2263 ; 230,2268 295,2268 ; 230,2273 295,2273 ; 230,2288 295,2288 ; 230,2293 295,2293 ; 230,2298 295,2298 ; 369.96,2268 369.96,2283 ; 374.98,2268 374.98,2283 ; 0,2243 420,2243 420,2540 0,2540 0,2243
  lines w0.6: 8,2273 20,2273 ; 8,2308 20,2308 ; 8,2333 20,2333 ; 8,2358 20,2358 ; 8,2475 20,2475 ; 13,2248 13,2393 ; 13,2415 13,2535 ; 20,2393 8,2393 8,2248 20,2248 ; 20,2415 8,2415 8,2535 20,2535 ; 20,2521 90,2521 90,2535 ; 230,2248 230,2303 415,2303 ; 230,2278 295,2278 ; 230,2283 295,2283 ; 237,2278 237,2303 ; 247,2248 247,2303 ; 270,2248 270,2303 ; 285,2248 285,2303 ; 295,2248 295,2303 415,2303 ; 295,2263 365,2263 415,2263 ; 295,2288 415,2288 ; 329.5,2514 334.5,2505 342.1,2519 ; 342.2,2519 384.5,2519 ; 365,2248 365,2288 ; 365,2268 415,2268 ; 365,2283 380,2283 415,2283 ; 380,2268 380,2288 ; 385.57,2263 385.57,2268 ; 397,2268 397,2288 ; 415,2311 415,2303 ; 20,2248 415,2248 415,2535 20,2535 ; 20,2248 20,2535
  text "ИУ4.11.03.03.23.05.52.04.002" at 89.5,2530.119 h6.72 r180
  text "Ra 12,5" at 342.2,2506.7 h10.75
  text "Перв. примен." at 12.194,2491.232 h5.38 r90
  text "ИУ4.11.03.03.23.05.04.001 СП" at 18.194,2476.959 h5.38 r90
  text "Справ. №" at 12.194,2435.033 h5.38 r90
  text "Подп. и дата" at 12.194,2361.891 h5.38 r90
  text "Инв. № дубл." at 12.194,2332.399 h5.38 r90
  text "Взам. инв. №" at 12.194,2307.346 h5.38 r90
  text "ИУ4.11.03.03.23.05.52.04.002" at 315.585,2293.079 h7.68
  text "Лит." at 368.295,2283.806 h5.38
  text "Масса" at 382.859,2283.806 h5.38
  text "Масштаб" at 397.002,2283.806 h5.38
  text "Изм." at 229.542,2278.806 h5.38
  text "Лист" at 237.024,2278.806 h5.38
  text "№ докум." at 249.51,2278.806 h5.38
  text "Подп." at 272.457,2278.806 h5.38
  text "Дата" at 284.556,2278.806 h5.38
  text "Подп. и дата" at 12.194,2277.391 h5.38 r90
  text "Разраб." at 230.533,2273.771 h5.38
  text "Бакулевский" at 247.68,2273.771 h4.57
  text "1:1" at 403.092,2273.079 h7.68
  text "Пров." at 230.533,2268.771 h5.38
  text "Семенцов С.Г." at 247.68,2268.771 h4.31
  text "Т.контр." at 230.533,2263.771 h5.38
  text "Лист" at 366.442,2263.771 h5.38
  text "Листов" at 387.485,2263.771 h5.38
  text "1" at 407.306,2263.771 h5.38
  text "Н.контр." at 230.533,2253.771 h5.23
  text "Утв." at 230.533,2248.771 h5.38
  text "Инв. № подл." at 12.194,2247.399 h5.38 r90
  text "Копировал" at 305.533,2243.771 h5.38
  text "Формат А3" at 383.401,2243.771 h5.38

## Text inside footprints (layer, text, board x,y; h text height)
ZBOAS196894921: Mechanical 7 "50" at 146.495,2399.379 h7.68; Mechanical 7 "40" at 126.406,2399.379 h7.68; Mechanical 7 "30" at 106.484,2399.379 h7.68; Mechanical 7 "20" at 86.477,2399.379 h7.68; Mechanical 7 "10" at 67.458,2399.379 h7.68; Mechanical 7 "0" at 48.29,2399.379 h7.68; Mechanical 7 "30" at 38.969,2468.579 h7.68; Mechanical 7 "20" at 38.955,2448.579 h7.68; Mechanical 7 "10" at 40.917,2428.579 h7.68; Mechanical 7 "0" at 42.58,2408.579 h7.68
ZBOAS753997874: Mechanical 12 "-" at 296.705,2446.679 h7.68; Mechanical 12 "Нет" at 338.157,2446.679 h7.68; Mechanical 12 "3,2" at 247.814,2446.679 h7.68; Mechanical 12 "4" at 374.867,2446.679 h7.68; Mechanical 12 "3,0" at 293.68,2455.979 h7.68; Mechanical 12 "Нет" at 338.157,2455.979 h7.68; Mechanical 12 "1,5" at 248.624,2455.979 h7.68; Mechanical 12 "9" at 374.728,2455.979 h7.68; Mechanical 12 "2,0" at 293.673,2464.579 h7.68; Mechanical 12 "Нет" at 338.157,2464.579 h7.68; Mechanical 12 "1" at 251.01,2464.579 h7.68; Mechanical 12 "89" at 372.738,2464.579 h7.68; Mechanical 12 "отв." at 370.68,2472.329 h7.68; Mechanical 12 "Кол." at 370.8,2479.829 h7.68; Mechanical 12 "металлизации" at 322.825,2472.329 h7.68; Mechanical 12 "Наличие" at 331.922,2479.829 h7.68; Mechanical 12 "площадки, мм" at 277.745,2472.329 h7.68; Mechanical 12 "Диаметр конт." at 276.003,2479.829 h7.68; Mechanical 12 "мм" at 248.134,2472.329 h7.68; Mechanical 12 "Диаметр отв.," at 231,2479.829 h7.68; Mechanical 12 "отв." at 204.852,2472.329 h7.68; Mechanical 12 "Обозначение" at 191.912,2479.829 h7.68; Mechanical 12 "Таблица 1" at 191.5,2487.5 h7.68